# Altium PCB PCB.PcbDoc
Units mm, origin at the board's own origin, x right, y up, seen from the top; angles counter-clockwise.
Board outline 105.38 x 87.73 mm, 2 copper layers (Top Layer, Bottom Layer); 49 components, 40 nets, 178 pads, 26 vias.
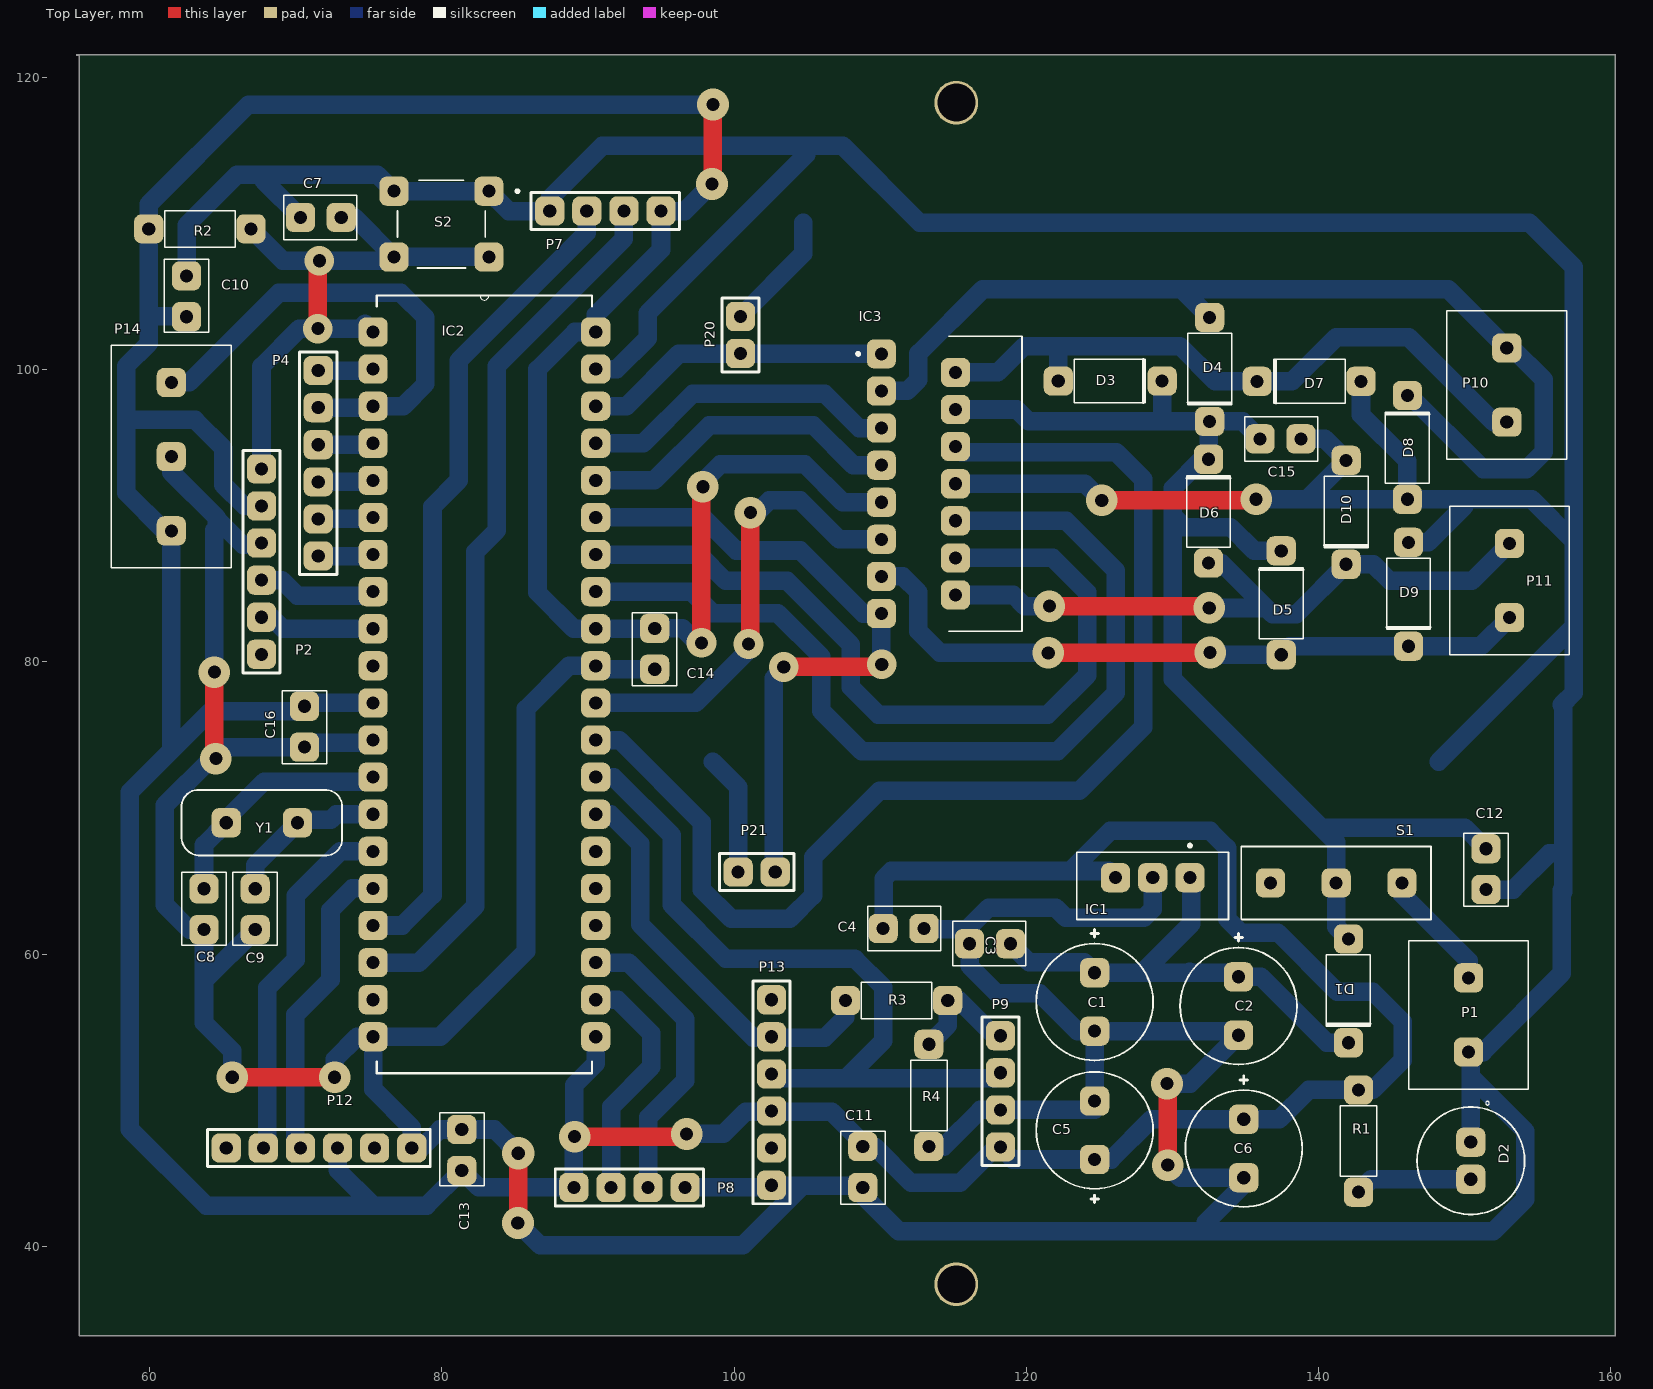
[diagram p0: Top Layer view]
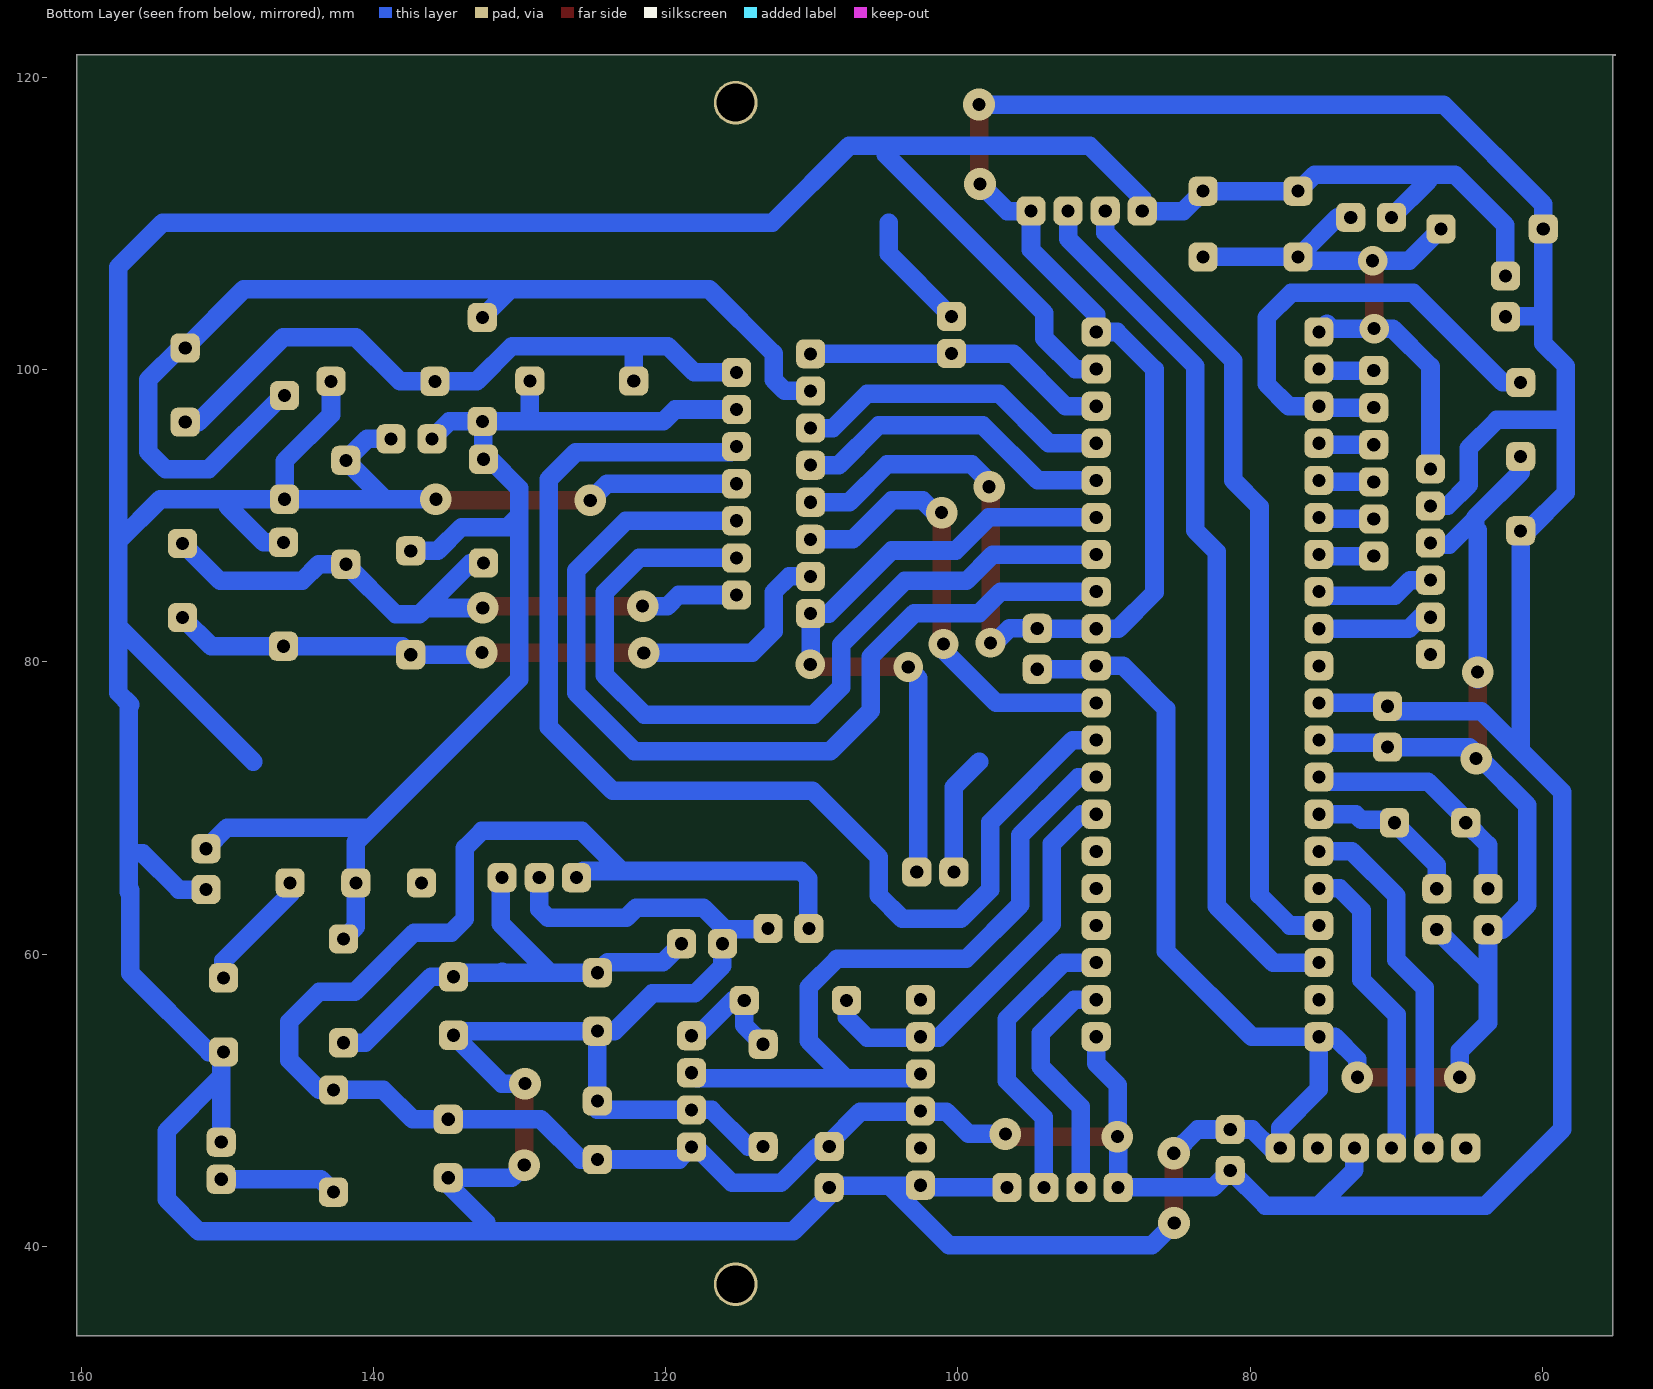
[diagram p1: Bottom Layer view, seen from below]

## Layer stack, top to bottom
Top Solder: solder mask 0.0102, Solder Resist, Dk 3.5
Top Layer: signal copper 0.0356
Dielectric 1: dielectric 0.32, FR-4, Dk 4.8
Bottom Layer: signal copper 0.0356
Bottom Solder: solder mask 0.0102, Solder Resist, Dk 3.5

## Board outline
55,121.539 cw(c55,121.564) 55,121.59 160.325,121.59 cw(c160.325,121.564) 160.351,121.564 160.351,33.884 cw(c160.325,33.884) 160.325,33.858 55.194,33.858 cw(c55.194,33.884) 55.168,33.884 55.168,121.539

## Design rules (kind name [scope] priority, off if disabled: settings)
Clearance [All] p1: gap=0.254 ignorepadtopadclearanceinfootprint=FALSE except(0: Arc-Hole Track-Hole SMDPad-Hole THPad-Hole Via-Hole Fill-Hole Poly-Hole Region-Hole Text-Hole)
PolygonConnect [All] p1: connectstyle=Relief reliefconductorwidth=0.254 reliefentries=4 polygonreliefangle="90 Angle" airgapwidth=0.254
RoutingVias [All] p1: holewidth=0.5 width=1.27 viastyle="Through Hole" minholewidth=0.5 minwidth=1.27 maxholewidth=0.5 maxwidth=1.27
SolderMaskExpansion [All] p1: expansion=0.102
Width [All] p1: maxlimit=1.27 minlimit=1.016 preferedwidth=1.27 minimp=50.000000 maximp=50.000000 favimp=50.000000
30 further rules are at their usual default settings.

## Classes and differential pairs
component class schematic: C1 C3 C4 C5 C6 C7 C8 C9 C10 C11 C12 C13 C14 C15 C16 D1 D2 D4 D5 D6 D7 D8 D9 D10 IC1 IC3 P1 P2 P4 P7 P8 P9 P10 P12 P13 P14 P20 P21 R1 R2 R3 R4 S1 S2 Y1

## Components (designator, comment, footprint, x,y, rotation, side; value= is the part's Value field where it differs from the comment)
C1 "Cap Pol1" elektrolit 124.689,56.718 r270 top value=470uF
C2 "Cap Pol1" elektrolit 134.544,56.439 r270 top value=470uF
C3 "Cap" keramicki 117.526,60.833 r0 top value=100nF
C4 "Cap" keramicki 111.608,61.62 r180 top value=100nF
C5 "Cap Pol1" elektrolit 124.689,47.93 r90 top value=470uF
C6 "Cap Pol1" elektrolit 134.899,46.685 r270 top value=470uF
C7 "Cap" keramicki 71.704,110.566 r0 top value=100nF
C8 "Cap" keramicki 63.83,63.068 r270 top value=33pF
C9 "Cap" keramicki 67.335,63.068 r270 top value=33pF
C10 "Cap" keramicki 62.636,105.032 r270 top value=100nF
C11 "Cap" keramicki 108.687,45.415 r90 top value=100nF
C12 "Cap" keramicki 151.359,65.811 r90 top value=100nF
C13 "Cap" keramicki 81.483,46.584 r270 top value=100nF
C14 "Cap" keramicki 94.437,80.899 r90 top value=100nF
C15 "Cap" keramicki 137.414,95.148 r180 top value=100nF
C16 "Cap" keramicki 70.46,75.565 r90 top value=100nF
D1 "1N4007" DIOD 142.062,57.48 r270 top
D2 "LED0" led 150.444,45.847 r270 top
D3 "Diode 1N4007" DIOD 125.755,99.238 r0 top
D4 "Diode 1N4007" DIOD 132.563,100.025 r270 top
D5 "Diode 1N4007" DIOD 137.465,84.049 r90 top
D6 "Diode 1N4007" DIOD 132.486,90.322 r90 top
D7 "Diode 1N4007" DIOD 139.37,99.212 r180 top
D8 "Diode 1N4007" DIOD 146.101,94.691 r90 top
D9 "Diode 1N4007" DIOD 146.177,84.633 r270 top
D10 "Diode 1N4007" DIOD 141.91,90.246 r270 top
IC1 "L7805" stabilizator 131.211,65.227 r180 top
IC2 "dspic30f4013" dspic 90.526,54.331 r0 top
IC3 "L298N" l298n 110.084,101.092 r0 top
P1 "power" terminal2 150.292,58.369 r270 top
P2 "Programator" HDR1X6 67.64,93.218 r270 top
P4 "GPIO" HDR1X6 71.526,99.949 r270 top
P7 "HC-SR04" HDR1X4 94.996,110.871 r180 top
P8 "HC-SR04" HDR1X4 89.027,44.018 r0 top
P9 "Bluetooth" HDR1X4 118.237,46.787 r90 top
P10 "motor1" terminal2 152.908,96.418 r90 top
P11 "motor2" terminal2 153.086,83.033 r90 top
P12 "FT232" HDR1X6 65.227,46.711 r0 top
P13 "FT232" HDR1X6 102.565,56.871 r270 top
P14 "Sharp" terminal3 61.468,88.976 r90 top
P20 "Header 2" HDR1X2 100.432,101.117 r90 top
P21 "Header 2" HDR1X2 102.819,65.608 r180 top
R1 "Res1" otp 142.748,47.193 r90 top value=1K
R2 "Res1" otp 63.424,109.652 r180 top value=10K
R3 "Res1" otp 111.125,56.82 r180 top value=4K7
R4 "Res1" otp 113.335,50.317 r90 top value=10K
S1 "SW-SPST" Prekidac 145.724,64.872 r180 top
S2 "SW-PB" taster 79.959,109.982 r180 top
Y1 "XTAL" oscilator 67.664,68.986 r180 top

## Footprints (in the part's own frame and the unit in brackets; to place one, negate y for a bottom-side part, rotate by r counter-clockwise, add the part's x,y. Pads: shape width x height; smd on the part's side, far side on the other; paste and mask are expansions set on the pad)
DIOD [mm]
  rrect50% 2x2 hole 0.9: 1(-3.556,0) 2(3.556,0)
  silkscreen extent -2.46,-1.5 2.41,1.5
dspic [mm]
  rrect50% 2x2 hole 0.9: 1(-15.24,48.26) 2(-15.24,45.72) 3(-15.24,43.18) 4(-15.24,40.64) 5(-15.24,38.1) 6(-15.24,35.56) 7(-15.24,33.02) 8(-15.24,30.48) 9(-15.24,27.94) 10(-15.24,25.4) 11(-15.24,22.86) 12(-15.24,20.32) 13(-15.24,17.78) 14(-15.24,15.24) 15(-15.24,12.7) 16(-15.24,10.16) 17(-15.24,7.62) 18(-15.24,5.08) 19(-15.24,2.54) 20(-15.24,0) 21(0,0) 22(0,2.54) 23(0,5.08) 24(0,7.62) 25(0,10.16) 26(0,12.7) 27(0,15.24) 28(0,17.78) 29(0,20.32) 30(0,22.86) 31(0,25.4) 32(0,27.94) 33(0,30.48) 34(0,33.02) 35(0,35.56) 36(0,38.1) 37(0,40.64) 38(0,43.18) 39(0,45.72) 40(0,48.26)
  silkscreen extent -14.99,-2.49 -0.25,50.75
elektrolit [mm]
  rrect50% 2x2 hole 0.9: 1(-2,0) 2(2,0)
  silkscreen extent -4.95,-4 4,4
HDR1X2 [mm] "Connector; Header; 2 Position"
  rrect50% 2x2 hole 0.9: 1(0,0) 2(2.54,0)
  silkscreen extent -1.27,-1.27 3.81,1.27
HDR1X4 [mm] "Connector; Header; 4 Position"
  rrect50% 2x2 hole 0.9: 1(0,0) 2(2.54,0) 3(5.08,0) 4(7.62,0)
  silkscreen extent -1.27,-1.27 8.89,1.27
HDR1X6 [mm] "Connector; Header; 6 Position"
  rrect50% 2x2 hole 0.9: 1(0,0) 2(2.54,0) 3(5.08,0) 4(7.62,0) 5(10.16,0) 6(12.7,0)
  silkscreen extent -1.27,-1.27 13.97,1.27
keramicki [mm]
  rrect50% 2x2 hole 0.9: 1(-1.4,-0.127) 2(1.4,-0.127)
  silkscreen extent -2.54,-1.65 2.46,1.4
l298n [mm]
  rrect50% 2x2 hole 0.9: 1(0,0) 2(5.08,-1.27) 3(0,-2.54) 4(5.08,-3.81) 5(0,-5.08) 6(5.08,-6.35) 7(0,-7.62) 8(5.08,-8.89) 9(0,-10.16) 10(5.08,-11.43) 11(0,-12.7) 12(5.08,-13.97) 13(0,-15.24) 14(5.08,-16.51) 15(0,-17.78)
  silkscreen extent -1.69,-18.99 9.63,1.21
led [mm]
  rrect50% 2x2 hole 0.9: 1(1.27,0) 2(-1.27,0)
  silkscreen extent -4.06,-3.68 3.68,3.68
oscilator [mm]
  rrect50% 2x2 hole 0.9: 1(-2.44,0) 2(2.44,0)
  silkscreen extent -5.5,-2.25 5.5,2.25
otp [mm]
  rrect50% 2x2 hole 0.9: 1(-3.5,0) 2(3.5,0)
  silkscreen extent -2.41,-1.25 2.41,1.25
Prekidac [mm]
  rrect50% 2x2 hole 0.9: 1(0,0) 2(4.5,0) 3(9,0)
  silkscreen extent -2,-2.5 11,2.5
stabilizator [mm]
  rrect50% 2x2 hole 0.9: 1(0,0) 2(2.55,0) 3(5.1,0)
  silkscreen extent -2.65,-2.29 7.75,2.86
taster [mm]
  rrect50% 2x2 hole 0.9: 1(-3.25,-2.25) 1(3.25,-2.25) 2(-3.25,2.25) 2(3.25,2.25)
  silkscreen extent -5.31,-3 3,3
terminal2 [mm]
  rrect50% 2x2 hole 0.9: 1(0,0) 2(5.08,0)
  silkscreen extent -2.54,-4.1 7.62,4.1
terminal3 [mm]
  rrect50% 2x2 hole 0.9: 1(0,0) 2(5.08,0) 3(10.16,0)
  silkscreen extent -2.54,-4.1 12.7,4.1

## Part data
C1 C2 C5 C6: "Polarized Capacitor (Radial)", LatestRevisionDate=17-Jul-2002, LatestRevisionNote="Re-released for DXP Platform.", PackageDescription="Polarized Capacitor (Radial); 2 Leads", PackageReference=RB7.6-15, Published=8-Jun-2000, Publisher="Altium Limited"
C3 C4 C7 C8 C9 C10 C11 C12 C13 C14 C15 C16: "Capacitor", LatestRevisionDate=17-Jul-2002, LatestRevisionNote="Re-released for DXP Platform.", PackageDescription="Radial Cap, Thru-Hole; 2 Leads; 0.3 in Pin Spacing", PackageReference=RAD-0.3, Published=8-Jun-2000, Publisher="Altium Limited"
D1: library part "Diode 1N4007", "1 Amp General Purpose Rectifier", Code_JEDEC=DO-204-AL, ComponentLink1Description="Manufacturer Link", ComponentLink1URL=http://www.fairchildsemi.com/, ComponentLink2Description=Datasheet, ComponentLink2URL=http://www.fairchildsemi.com/ds/1N%2F1N4001.pdf, DatasheetVersion=1998, LatestRevisionDate=17-Jul-2002, LatestRevisionNote="Re-released for DXP Platform.", PackageDescription="Diode, Axial; Body 5.2 x 2.7 mm (LxDia. max), Lead Dia. 0.86 mm (max)", PackageReference=DO-41, PackageVersion=Aug-1999, Published=8-Jun-2000, Publisher="Altium Limited"
D2: "Typical INFRARED GaAs LED", LatestRevisionDate=08-Jul-2005, LatestRevisionNote="Mech Layer 1 removed.", PackageDescription="LED; 2 Leads", PackageReference=LED-0, Published=8-Jun-2000, Publisher="Altium Limited"
D3 D4 D5 D6 D7 D8 D9 D10: "1 Amp General Purpose Rectifier", Code_JEDEC=DO-204-AL, ComponentLink1Description="Manufacturer Link", ComponentLink1URL=http://www.fairchildsemi.com/, ComponentLink2Description=Datasheet, ComponentLink2URL=http://www.fairchildsemi.com/ds/1N%2F1N4001.pdf, DatasheetVersion=1998, LatestRevisionDate=17-Jul-2002, LatestRevisionNote="Re-released for DXP Platform.", PackageDescription="Diode, Axial; Body 5.2 x 2.7 mm (LxDia. max), Lead Dia. 0.86 mm (max)", PackageReference=DO-41, PackageVersion=Aug-1999, Published=8-Jun-2000, Publisher="Altium Limited"
IC3: "Dual Full Bridge Motor Driver 15-Pin(15+Tab) MULTIWATT V Tube", Package=None, Availability=Unavailable, MP=L298N, Price=None
P1 P10 P11: library part "Header 2", "Header, 2-Pin", LatestRevisionDate=17-Jul-2002, LatestRevisionNote="Re-released for DXP Platform.", Publisher="Altium Limited"
P2 P4 P9 P12 P13: library part "Header 6", "Header, 6-Pin", LatestRevisionDate=17-Jul-2002, LatestRevisionNote="Re-released for DXP Platform.", Publisher="Altium Limited"
P7 P8: library part "Header 4", "Header, 4-Pin", LatestRevisionDate=17-Jul-2002, LatestRevisionNote="Re-released for DXP Platform.", Publisher="Altium Limited"
P14: library part "Header 3", "Header, 3-Pin", LatestRevisionDate=17-Jul-2002, LatestRevisionNote="Re-released for DXP Platform.", Publisher="Altium Limited"
P20 P21: "Header, 2-Pin", LatestRevisionDate=17-Jul-2002, LatestRevisionNote="Re-released for DXP Platform.", Publisher="Altium Limited"
R1 R2 R3 R4: "Resistor", LatestRevisionDate=17-Jul-2002, LatestRevisionNote="Re-released for DXP Platform.", PackageDescription="Axial Device, Thru-Hole; 2 Leads; 0.3 in Pin Spacing", PackageReference=AXIAL-0.3, Published=8-Jun-2000, Publisher="Altium Limited"
S1: "Single-Pole, Single-Throw Switch", LatestRevisionDate=17-Jul-2002, LatestRevisionNote="Re-released for DXP Platform.", PackageDescription="Switch; 2 Leads", PackageReference=SPST-2, Published=24-Mar-1999, Publisher="Altium Limited"
S2: "Switch", LatestRevisionDate=17-Jul-2002, LatestRevisionNote="Re-released for DXP Platform.", PackageDescription="Switch; 2 Leads", PackageReference=SPST-2, Published=24-Mar-1999, Publisher="Altium Limited"
Y1: "Crystal Oscillator", LatestRevisionDate=17-Jul-2002, LatestRevisionNote="Re-released for DXP Platform.", PackageDescription="Crystal, Thru-Hole; 2 Leads; Body 3.1 x 8.2 mm (Dia.xH)", PackageReference=R38, Published=8-Jun-2000, Publisher="Altium Limited"

## Free pads (board coordinates)
  round 3 hole 2.6: ""(115.214,37.389) ""(115.214,118.288)

## Via types
v1: diameter 2.159, hole 0.9, Top Layer to Bottom Layer, 16 vias
v2: diameter 2.032, hole 0.9, Top Layer to Bottom Layer, 6 vias
v3: diameter 2.2, hole 0.9, Top Layer to Bottom Layer, 4 vias

## Nets (pads, with @x,y where several pads share a name; then routed paths per layer and width w, separated by ;. In a path a pad name is that pad's centre, name@x,y a point inside that pad or via, vN(x,y) a via of type N, cw(c..) or ccw(c..) an arc to the next point about the centre after c; other vN are vias at no path point)
5V: C4.2 C5.1 C6.1 C10.2 C11.2 C13.2 C14.2 C16.2 IC1.3 IC2.11 IC2.21 IC2.32 IC2.40 IC3.9 P2.2 P7.1 P8.1 P9.1 P12.4 P13.4 P14.1 R1.2 R2.2 | length 384.8
  Top Layer w1.27: v1(89.078,47.498) 96.571,47.498 v1(96.749,47.676) ; v2(97.765,81.305) 97.765,91.923 97.841,91.999 v1(97.866,91.999) ; v3(98.476,112.725) 98.552,112.801 v3(98.552,118.161)
  Bottom Layer w1.27: 61.468,74.092 P14.1 60.985,88.976 58.369,91.592 58.369,96.571 ; C10.2 62.484,103.657 59.924,103.657 ; P2.2 66.472,90.678 65.024,92.126 65.024,94.64 63.094,96.571 58.369,96.571 ; P12.4 72.847,45.212 75.286,42.774 ; IC2.11 70.812,77.191 C16.2 70.253,76.632 64.16,76.632 58.623,71.095 58.623,48.006 63.856,42.774 75.286,42.774 ; v1@89.052,47.473 89.027,47.447 P8.1 82.522,44.018 C13.2 78.946,42.774 75.286,42.774 ; v1(89.078,47.498) 89.052,47.523 89.052,51.029 90.526,52.502 IC2.21 ; v1(96.749,47.676) 96.761,47.688 99.276,47.688 100.787,49.2 106.68,49.2 108.814,47.066 C11.2 109.623,46.815 112.116,44.323 115.468,44.323 117.932,46.787 P9.1 119.094,45.93 C5.1 125.813,45.93 128.568,48.685 C6.1 137.331,48.685 139.339,50.693 R1.2 143.733,50.693 145.771,52.73 145.771,55.372 143.739,57.404 141.3,57.404 137.236,61.468 134.696,61.468 133.756,62.408 133.756,67.259 132.588,68.428 125.755,68.428 123.012,65.684 ; v2(97.765,81.305) 97.46,81.305 96.466,82.299 C14.2 94.536,82.271 IC2.32 89.027,82.271 86.538,84.76 86.538,100.025 89.103,102.591 IC2.40 90.526,103.759 94.996,108.229 P7.1 96.622,110.871 v3(98.476,112.725) ; v1(97.866,91.999) 97.866,92.329 99.06,93.523 104.851,93.523 107.442,90.932 IC3.9 ; v3(98.552,118.161) 66.751,118.161 59.924,111.333 R2.2 59.924,103.657 ; C4.2@110.233,61.747 110.233,65.148 110.769,65.684 123.012,65.684 ; IC1.3 125.654,65.684 123.012,65.684 ; 58.369,96.571 58.369,100.254 59.924,101.808 59.924,103.657
EnA: IC2.29 IC3.6 | length 83
  Bottom Layer w1.27: IC2.29 92.151,74.651 97.79,69.012 97.79,64.414 99.797,62.408 103.81,62.408 105.41,64.008 105.41,66.624 109.957,71.171 123.647,71.171 128.016,75.54 128.016,92.507 126.162,94.361 115.545,94.361 IC3.6
EnB: IC2.30 IC3.11 | length 32.2
  Top Layer w1.27: v2(100.99,81.229) 101.117,81.356 v1(101.117,90.221)
  Bottom Layer w1.27: IC2.30 97.384,77.191 100.99,80.797 v2(100.99,81.229) ; v1(101.117,90.221) 101.575,90.221 102.413,91.059 104.521,91.059 107.188,88.392 IC3.11 IC3.11@109.855,88.163
GND: C1.2 C2.2 C3.1 C4.1 C5.2 C6.2 C7.1 C8.2 C9.2 C10.1 C11.1 C12.1 C13.1 C14.1 C15.1 C16.1 D2.2 D7.1 D8.1 D9.1 D10.1 IC1.2 IC2.12 IC2.20 IC2.31 IC2.39 IC3.8 P1.2 P2.3 P7.4 P8.4 P9.2 P12.6 P13.6 P14.2 R4.1 S2.1 | length 596.2
  Top Layer w1.27: v1(64.414,79.299) 64.414,73.584 64.567,73.431 v1(64.516,73.381) ; v1(65.634,51.562) v1(72.644,51.562) ; v3(85.192,41.58) 85.217,41.605 v3(85.217,46.355) ; v1(125.171,91.059) 135.661,91.059 v1(135.738,91.135) ; v1(129.642,51.13) 129.692,51.079 v1(129.692,45.542)
  Bottom Layer w1.27: P14.2 61.468,92.989 64.592,89.865 64.592,89.179 ; C10.1 62.509,109.906 65.964,113.36 67.793,113.36 ; v1@64.414,78.816 v1(64.414,79.299) 64.414,89.002 64.592,89.179 ; v1(65.634,51.562) 65.634,53.365 63.703,55.296 63.703,58.163 ; C9.2 63.703,58.163 ; P2.3 67.513,88.011 66.37,88.011 64.897,89.484 64.592,89.179 ; C7.1 67.793,112.951 67.793,113.36 ; v1(72.644,51.562) 72.644,52.781 74.193,54.331 IC2.20 ; IC2.12 75.108,74.473 70.894,74.473 C16.1 64.996,74.165 64.516,73.685 v1(64.516,73.381) 64.211,73.381 61.011,70.18 61.011,63.373 62.716,61.668 C8.2 63.703,58.163 ; v3(85.192,41.58) 86.716,40.056 100.609,40.056 104.673,44.12 ; v3(85.217,46.355) 83.588,47.984 C13.1 79.861,47.984 78.588,46.711 P12.6 77.927,48.108 75.286,50.749 IC2.20 ; IC2.39 91.973,100.051 94.082,102.159 94.082,103.886 104.927,114.732 ; C14.1 90.757,79.499 IC2.31 88.697,79.731 85.75,76.784 85.75,60.198 79.883,54.331 IC2.20 ; P8.4@96.749,44.12 P8.4 102.413,44.018 P13.6 102.616,44.12 104.673,44.12 ; C4.1@113.008,61.697 115.951,61.697 117.424,63.17 122.022,63.17 122.707,62.484 128.067,62.484 128.661,63.078 IC1.2 ; R4.1 114.356,46.817 116.865,49.327 P9.2 C5.2@124.086,49.327 ; IC3.8 124.028,92.202 v1(125.171,91.059) ; C3.1 116.126,59.185 118.008,57.302 120.929,57.302 123.514,54.718 C1.2 ; v1(129.642,51.13) 131.235,51.13 C2.2 134.264,54.718 C1.2 ; v1(129.692,45.542) 130.549,44.685 C6.2 134.899,44.221 132.309,41.631 ; v1(135.738,91.135) 139.243,91.135 ; C15.1 140.437,95.275 D10.1 139.243,91.135 ; D7.1 142.926,96.926 146.101,93.751 D8.1 ; D9.1 147.523,88.189 149.987,90.653 149.504,91.135 ; 148.253,73.177 157.328,82.252 ; P1.2 151.282,53.289 156.667,58.674 156.667,64.364 156.769,64.262 156.769,76.962 156.667,77.064 157.505,77.902 157.505,88.24 ; D2.2 150.444,51.435 ; P1.2@150.444,53.137 150.444,51.435 ; C12.1 153.337,64.411 155.829,66.904 156.667,66.904 ; 67.793,113.36 75.581,113.36 76.709,112.232 83.209,112.232 84.57,110.871 P7.4 87.376,111.735 90.983,115.341 107.442,115.341 112.7,110.084 154.451,110.084 157.505,107.029 157.505,88.24 ; 104.673,44.12 108.709,44.12 C11.1 108.814,43.485 111.277,41.021 151.994,41.021 154.178,43.205 154.178,47.879 150.622,51.435 150.444,51.435 ; C5.2@124.086,49.327 124.689,49.327 C5.2 ; C5.2@124.086,49.327 C5.2 ; C5.2 C1.2 ; 139.243,91.135 D8.1 ; D8.1 149.504,91.135 ; 149.504,91.135 154.61,91.135 157.505,88.24
In1: IC2.37 IC3.5 | length 21.9
  Bottom Layer w1.27: IC2.37 93.777,94.971 97.155,98.349 106.223,98.349 108.56,96.012 IC3.5
In2: IC2.36 IC3.7 | length 22.2
  Bottom Layer w1.27: IC2.36 94.539,92.431 98.298,96.19 105.435,96.19 108.153,93.472 IC3.7
In3: IC2.33 IC3.10 | length 64.7
  Bottom Layer w1.27: IC2.33 97.079,84.811 98.552,83.337 102.997,83.337 105.969,80.366 105.969,76.657 108.737,73.889 122.149,73.889 126.136,77.876 126.136,86.258 122.733,89.662 IC3.10
In4: IC2.34 IC3.12 | length 56.7
  Bottom Layer w1.27: IC2.34 97.612,87.351 99.416,85.547 103.632,85.547 108.001,81.178 108.001,78.257 109.88,76.378 121.463,76.378 124.181,79.096 124.181,84.76 121.818,87.122 IC3.12
INT0: IC2.17 P7.3 | length 56.1
  Bottom Layer w1.27: IC2.17 77.267,61.951 79.35,64.033 79.35,90.627 81.153,92.431 81.153,100.635 89.916,109.398 P7.3
INT1: IC2.23 P8.3 | length 20.3
  Bottom Layer w1.27: IC2.23 92.786,59.411 96.647,55.55 96.647,51.333 94.132,48.819 94.132,44.044 P8.3
MCLR: C7.2 IC2.1 P2.1 R2.1 S2.2 | length 43
  Top Layer w1.27: v2(71.501,102.819) 71.501,107.518 71.526,107.544 v2(71.603,107.467)
  Bottom Layer w1.27: R2.1 69.108,107.467 v2(71.603,107.467) 76.445,107.467 S2.2@76.709,107.732 ; P2.1 67.64,100.228 70.231,102.819 v2(71.501,102.819) 74.397,102.819 74.727,103.149 IC2.1 ; C7.2 74.002,110.439 S2.2@76.709,107.732 ; S2.2@83.209,107.732 S2.2@76.709,107.732
NetC1_1: C1.1 C2.1 C3.2 D1.2 IC1.1 | length 34
  Bottom Layer w1.27: C3.2 120.196,59.436 123.971,59.436 C1.1 127.94,58.718 ; 131.211,58.774 131.267,58.718 ; IC1.1 131.299,65.139 131.299,62.078 127.94,58.718 ; D1.2 140.589,53.924 136.074,58.439 C2.1 134.264,58.718 131.267,58.718 ; 127.94,58.718 131.267,58.718
NetD2_1: D2.1 R1.1 | length 8.1
  Bottom Layer w1.27: R1.1 143.632,44.577 D2.1
NetP1_1: P1.1 S1.1 | length 8.4
  Bottom Layer w1.27: S1.1 145.724,64.105 150.292,59.538 P1.1
NetP9_4: P9.4 R3.1 R4.2 | length 8.1
  Bottom Layer w1.27: R4.2 114.625,55.108 R3.1 115.418,56.82 117.831,54.407 P9.4
NetP20_2: P20.2 | length 8.2
  Bottom Layer w1.27: P20.2 104.731,107.957 104.731,110.084
NetP21_2: P21.2 | length 8.3
  Bottom Layer w1.27: 98.533,73.177 100.279,71.431 P21.2
OSC1: C8.1 IC2.13 Y1.2 | length 16.6
  Bottom Layer w1.27: C8.1 63.703,67.466 Y1.2 ; Y1.2@65.11,69.101 67.815,71.806 74.981,71.806 IC2.13
OSC2: C9.1 IC2.14 Y1.1 | length 11.1
  Bottom Layer w1.27: C9.1 67.208,66.091 Y1.1 ; Y1.1@70.104,69.19 72.39,69.19 72.771,69.571 IC2.14
Out1: D3.1 D7.2 IC3.2 P10.1 | length 45.7
  Bottom Layer w1.27: IC3.2 118.059,99.822 119.863,101.625 122.53,101.625 ; D3.1 122.199,101.295 122.53,101.625 ; P10.1 152.019,96.418 146.202,102.235 141.224,102.235 138.201,99.212 D7.2 132.944,99.212 130.531,101.625 122.53,101.625
Out2: D4.1 D8.2 IC3.3 P10.2 | length 71.5
  Bottom Layer w1.27: IC3.3 111.862,98.552 112.624,99.314 112.624,101.117 117.018,105.512 130.632,105.512 ; D4.1 130.632,105.512 ; D8.2 146.253,98.247 151.308,93.193 154.254,93.193 155.448,94.386 155.448,99.314 153.264,101.498 P10.2 148.895,105.512 130.632,105.512
Out3: D5.1 D9.2 IC3.13 P11.1 | length 47.7
  Top Layer w1.27: v1(121.514,80.62) 132.563,80.62 v1(132.588,80.645)
  Bottom Layer w1.27: IC3.13 111.557,85.852 112.624,84.785 112.624,82.093 114.097,80.62 v1(121.514,80.62) ; v1(132.588,80.645) 132.749,80.484 D5.1@137.322,80.484 ; D5.1 138.049,81.077 D9.2 151.13,81.077 P11.1
Out4: D6.1 D10.2 IC3.14 P11.2 | length 46.7
  Top Layer w1.27: v1(121.59,83.82) 132.41,83.82 v1(132.537,83.693)
  Bottom Layer w1.27: IC3.14 119.126,84.582 119.888,83.82 v1(121.59,83.82) ; D6.1 133.375,86.766 136.449,83.693 ; v1(132.537,83.693) 136.449,83.693 ; P11.2 150.52,85.547 144.907,85.547 143.764,86.69 D10.2 138.506,83.287 138.506,83.261 136.881,83.261 136.449,83.693
PGC: IC2.9 P2.5 | length 8
  Bottom Layer w1.27: P2.5 68.326,83.058 69.113,82.271 IC2.9
PGD: IC2.8 P2.4 | length 8.2
  Bottom Layer w1.27: P2.4 69.037,85.598 70.104,84.531 75.006,84.531 IC2.8
RB0: IC2.2 P4.1 | length 3.8
  Bottom Layer w1.27: P4.1 75.184,99.949 IC2.2
RB1: IC2.3 P4.2 P14.3 | length 33.2
  Bottom Layer w1.27: P14.3 62.687,99.136 68.834,105.283 77.165,105.283 78.867,103.581 78.867,99.035 77.343,97.511 IC2.3 75.184,97.409 P4.2
RB2: IC2.4 P4.3 | length 3.8
  Bottom Layer w1.27: P4.3 75.184,94.869 IC2.4
RB3: IC2.5 P4.4 | length 3.8
  Bottom Layer w1.27: P4.4 75.184,92.329 IC2.5
RB4: IC2.6 P4.5 | length 3.8
  Bottom Layer w1.27: P4.5 75.184,89.789 IC2.6
RB5: IC2.7 P4.6 | length 3.8
  Bottom Layer w1.27: P4.6 75.184,87.249 IC2.7
RB9: IC2.38 IC3.1 P20.1 | length 21
  Bottom Layer w1.27: IC2.38 92.634,97.511 96.215,101.092 IC3.1
RB12: IC2.35 IC3.15 P21.1 | length 47
  Top Layer w1.27: v2(103.403,79.654) 109.931,79.654 v2(110.109,79.832)
  Bottom Layer w1.27: IC2.35 97.892,89.891 100.152,87.63 104.521,87.63 108.839,83.312 IC3.15 110.084,79.858 v2(110.109,79.832) ; P21.1@102.946,65.608 102.718,65.837 102.718,78.892 103.403,79.578 v2(103.403,79.654)
TRIG1: IC2.18 P7.2 | length 60.4
  Bottom Layer w1.27: IC2.18 78.41,59.411 82.271,63.271 82.271,87.528 83.744,89.002 83.744,100.254 92.456,108.966 P7.2
TRIG2: IC2.22 P8.2 | length 16.5
  Bottom Layer w1.27: IC2.22 92.024,56.871 94.336,54.559 94.336,52.273 91.592,49.53 91.592,44.044 P8.2
U1ARX: IC2.16 P12.3 | length 21
  Bottom Layer w1.27: P12.3 69.952,47.066 69.952,55.829 72.365,58.242 72.365,62.992 73.863,64.491 IC2.16
U1ATX: IC2.15 P12.2 | length 24.8
  Bottom Layer w1.27: P12.2 68.047,46.99 68.047,57.683 69.977,59.614 69.977,63.983 73.025,67.031 IC2.15
U2RX: IC2.28 P9.3 P13.3 | length 51.3
  Bottom Layer w1.27: IC2.28 91.745,72.111 95.733,68.123 95.733,63.373 99.441,59.665 108.28,59.665 110.211,57.734 110.211,54.051 107.899,51.74 ; P13.3 102.87,51.486 117.856,51.486 P9.3
U2TX: IC2.27 P13.2 R3.2 | length 28.4
  Bottom Layer w1.27: IC2.27 91.542,69.571 93.574,67.539 93.574,62.027 101.321,54.28 106.223,54.28 107.625,55.682 R3.2
VCC: C12.2 C15.2 D1.1 D3.2 D4.2 D5.2 D6.2 IC3.4 S1.2 | length 85.9
  Bottom Layer w1.27: IC3.4 119.355,97.282 120.167,96.469 D4.2 ; 129.311,97.003 D3.2 ; 130.073,89.992 130.835,89.23 133.985,89.23 135.611,87.605 D5.2 ; C15.2 134.82,96.469 D4.2 ; D1.1 141.224,61.874 S1.2 141.224,67.64 140.208,68.656 ; C12.2 150.041,68.656 140.208,68.656 ; D4.2 132.486,96.393 D6.2 132.029,93.878 130.048,91.897 130.048,78.816 140.208,68.656
pads on no net: IC2.10 IC2.19 IC2.24 IC2.25 IC2.26 P2.6 P12.1 P12.5 P13.1 P13.5 S1.3